# Altium PCB Route_Guide_and_Tuning.PcbDoc (part 8 of 8)
Units mil, origin at the board's own origin, x right, y up, seen from the top; angles counter-clockwise.
Board outline 3600 x 2300 mil, 14 copper layers (L1 TOP, L2_G, L3 SIG, L4_G, L4 SIG, L6_P, L7_G, L10_P, L11_P, L7 SIG, L13_P, L8 SIG, L15_G, L10 BOT), stack 89.291 mil thick; 4 components, 1934 nets, 2174 pads, 2165 vias.
Unrouted connection lines stored in the file: 123.
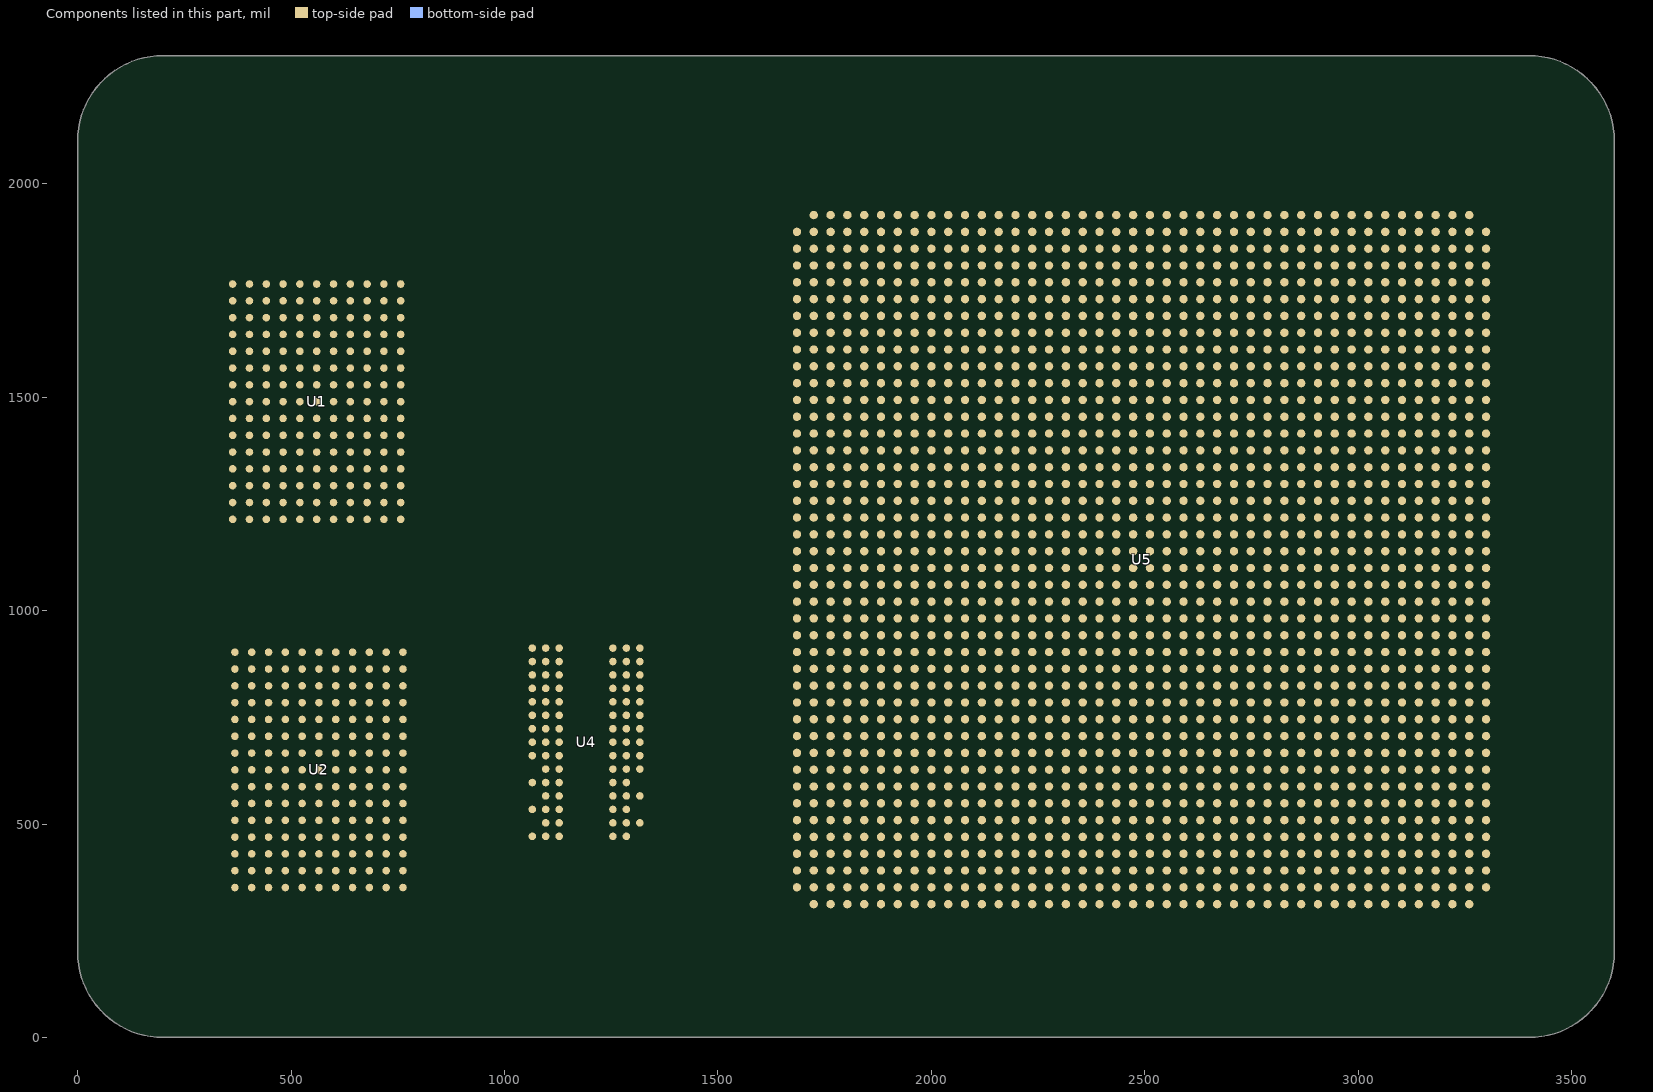
[diagram p20: the components of this part, seen from the top]

## Via types
v1: diameter 19.4, hole 10, L1 TOP to L10 BOT, 2087 vias
v2: diameter 18.6, hole 10, L1 TOP to L10 BOT, tented both sides, 78 vias

## Nets (pads, with @x,y where several pads share a name; then routed paths per layer and width w, separated by ;. In a path a pad name is that pad's centre, name@x,y a point inside that pad or via, vN(x,y) a via of type N, cw(c..) or ccw(c..) an arc to the next point about the centre after c; other vN are vias at no path point) (continued)
copper on no net: | length 3797.3
  L1 TOP w5: v1(540.43,1272.79) 560.12,1292.48 ; v2(1049.33,455.43) 1065.08,471.18 ; v2(1049.33,518.43) 1065.08,534.17 ; v2(1049.33,581.42) 1065.08,597.17 ; v2(1049.33,644.41) 1065.08,660.16 ; v2(1049.33,707.4) 1065.08,691.65 ; v2(1049.33,738.9) 1065.08,723.15 ; v2(1049.33,770.39) 1065.08,754.65 ; v2(1049.33,801.89) 1065.08,786.14 ; v2(1049.33,833.39) 1065.08,817.64 ; v2(1049.33,864.88) 1065.08,849.13 ; v2(1049.33,896.38) 1065.08,880.63 ; v2(1049.33,927.87) 1065.08,912.13 ; v2(1080.83,455.43) 1096.57,471.18 ; v2(1080.83,486.93) 1096.57,502.68 ; v2(1080.83,518.43) 1096.57,534.17 ; v2(1080.83,549.92) 1096.57,565.67 ; v2(1080.83,581.42) 1096.57,597.17 ; v2(1080.83,612.91) 1096.57,628.66 ; v2(1080.83,644.41) 1096.57,660.16 ; v2(1080.83,707.4) 1096.57,691.65 ; v2(1080.83,738.9) 1096.57,723.15 ; v2(1080.83,770.39) 1096.57,754.65 ; v2(1080.83,833.39) 1096.57,817.64 ; v2(1080.83,864.88) 1096.57,849.13 ; v2(1080.83,896.38) 1096.57,880.63 ; v2(1112.32,486.93) 1128.07,502.68 ; v2(1112.32,518.43) 1128.07,534.17 ; v2(1112.32,549.92) 1128.07,565.67 ; v2(1112.32,581.42) 1128.07,597.17 ; v2(1112.32,612.91) 1128.07,628.66 ; v2(1112.32,644.41) 1128.07,660.16 ; v2(1112.32,707.4) 1128.07,691.65 ; v2(1112.32,738.9) 1128.07,723.15 ; v2(1112.32,770.39) 1128.07,754.65 ; v2(1112.32,801.89) 1128.07,786.14 ; v2(1112.32,833.39) 1128.07,817.64 ; v2(1112.32,864.88) 1128.07,849.13 ; v2(1112.32,896.38) 1128.07,880.63 ; v2(1112.32,927.87) 1128.07,912.13 ; 1254.05,502.68 v2(1269.8,486.93) ; 1254.05,534.17 v2(1269.8,518.43) ; 1254.05,565.67 v2(1269.8,549.92) ; 1254.05,597.17 v2(1269.8,581.42) ; 1254.05,628.66 v2(1269.8,612.91) ; 1254.05,660.16 v2(1269.8,644.41) ; 1254.05,691.65 v2(1269.8,707.4) ; 1254.05,723.15 v2(1269.8,738.9) ; 1254.05,754.65 v2(1269.8,770.39) ; 1254.05,786.14 v2(1269.8,801.89) ; 1254.05,817.64 v2(1269.8,833.39) ; 1254.05,849.13 v2(1269.8,864.88) ; 1254.05,880.63 v2(1269.8,896.38) ; 1254.05,912.13 v2(1269.8,927.87) ; 1285.55,471.18 v2(1301.3,455.43) ; 1285.55,502.68 v2(1301.3,486.93) ; 1285.55,534.17 v2(1301.3,518.43) ; 1285.55,565.67 v2(1301.3,549.92) ; 1285.55,597.17 v2(1301.3,581.42) ; 1285.55,628.66 v2(1301.3,612.91) ; 1285.55,660.16 v2(1301.3,644.41) ; 1285.55,691.65 v2(1301.3,707.4) ; 1285.55,723.15 v2(1301.3,738.9) ; 1285.55,754.65 v2(1301.3,770.39) ; 1285.55,817.64 v2(1301.3,833.39) ; 1285.55,849.13 v2(1301.3,864.88) ; 1285.55,880.63 v2(1301.3,896.38) ; 1317.05,502.68 v2(1332.79,486.93) ; 1317.05,565.67 v2(1332.79,549.92) ; 1317.05,628.66 v2(1332.79,612.91) ; 1317.05,660.16 v2(1332.79,644.41) ; 1317.05,691.65 v2(1332.79,707.4) ; 1317.05,723.15 v2(1332.79,738.9) ; 1317.05,754.65 v2(1332.79,770.39) ; 1317.05,786.14 v2(1332.79,801.89) ; 1317.05,817.64 v2(1332.79,833.39) ; 1317.05,849.13 v2(1332.79,864.88) ; 1317.05,880.63 v2(1332.79,896.38) ; 1317.05,912.13 v2(1332.79,927.87) ; v1(1665.47,450.08) 1685.16,469.76 ; v1(1665.47,489.45) 1685.16,509.13 ; v1(1665.47,607.56) 1685.16,627.24 ; v1(1665.47,646.93) 1685.16,666.61 ; v1(1665.47,1237.48) 1685.16,1217.8 ; v1(1665.47,1434.33) 1685.16,1414.65 ; v1(1665.47,1670.55) 1685.16,1650.87 ; v1(1665.47,1709.92) 1685.16,1690.24 ; v1(1704.84,371.34) 1724.53,391.02 ; v1(1704.84,410.71) 1724.53,430.39 ; v1(1704.84,528.82) 1724.53,548.5 ; v1(1704.84,568.19) 1724.53,587.87 ; v1(1704.84,1158.74) 1724.53,1139.06 ; v1(1704.84,1434.33) 1724.53,1414.65 ; v1(1704.84,1709.92) 1724.53,1690.24 ; v1(1744.21,292.6) 1763.9,312.28 ; v1(1744.21,331.97) 1763.9,351.65 ; v1(1744.21,450.08) 1763.9,469.76 ; v1(1744.21,489.45) 1763.9,509.13 ; v1(1744.21,1355.59) 1763.9,1335.91 ; v1(1783.58,371.34) 1803.27,391.02 ; v1(1783.58,410.71) 1803.27,430.39 ; v1(1980.43,1237.48) 2000.12,1217.8 ; v1(1980.43,1355.59) 2000.12,1335.91 ; v1(1980.43,1394.96) 2000.12,1375.28 ; v1(2019.8,1237.48) 2039.49,1217.8 ; v1(2059.17,1158.74) 2078.86,1139.06 ; v1(2059.17,1276.85) 2078.86,1257.17 ; v1(2059.17,1316.22) 2078.86,1296.54 ; v1(2059.17,1355.59) 2078.86,1335.91 ; v1(2098.54,528.82) 2118.23,548.5 ; v1(2098.54,568.19) 2118.23,587.87 ; v1(2098.54,1001.26) 2118.23,1020.94 ; v1(2098.54,1080) 2118.23,1099.69 ; v1(2098.54,1158.74) 2118.23,1139.06 ; v1(2098.54,1316.22) 2118.23,1296.54 ; v1(2137.91,1080) 2157.6,1099.69 ; v1(2137.91,1276.85) 2157.6,1257.17 ; v1(2177.28,1040.63) 2196.97,1060.32 ; v1(2177.28,1080) 2196.97,1099.69 ; v1(2177.28,1158.74) 2196.97,1139.06 ; v1(2177.28,1198.11) 2196.97,1178.43 ; v1(2177.28,1276.85) 2196.97,1257.17 ; v1(2216.65,1198.11) 2236.34,1178.43 ; v1(2256.02,528.82) 2275.71,548.5 ; v1(2256.02,568.19) 2275.71,587.87 ; v1(2334.76,528.82) 2354.45,548.5 ; v1(2334.76,568.19) 2354.45,587.87 ; 2669.41,548.5 v1(2689.1,528.82) ; 2669.41,587.87 v1(2689.1,568.19) ; 2748.15,1217.8 v1(2767.84,1237.48) ; 2787.52,1257.17 v1(2807.21,1276.85) ; 2826.89,1375.28 v1(2846.58,1394.96) ; 2866.26,1060.32 v1(2885.95,1040.63) ; 2866.26,1611.5 v1(2885.95,1631.18) ; 2905.63,1296.54 v1(2925.32,1316.22) ; 2905.63,1572.13 v1(2925.32,1591.81) ; 2945,1375.28 v1(2964.69,1394.96) ; 2945,1650.87 v1(2964.69,1670.55) ; 3023.74,1611.5 v1(3043.43,1631.18) ; 3023.74,1847.72 v1(3043.43,1867.4) ; 3063.11,863.46 v1(3082.8,843.78) ; 3063.11,1847.72 v1(3082.8,1867.4) ; 3102.48,627.24 v1(3122.17,607.56) ; 3102.48,666.61 v1(3122.17,646.93) ; 3102.48,902.83 v1(3122.17,883.15) ; 3102.48,1768.98 v1(3122.17,1788.66) ; 3102.48,1926.46 v1(3122.17,1946.14) ; 3181.22,942.2 v1(3200.91,922.52) ; 3181.22,1532.76 v1(3200.91,1552.44) ; 3181.22,1926.46 v1(3200.91,1946.14) ; 3259.96,1454.02 v1(3279.65,1473.7) ; 3299.33,1532.76 v1(3319.02,1552.44)

## Polygon pours and split planes (outlines as drawn)
GND on L4_G (split plane): 3411.77,2279.61 3423.49,2278.46 3435.12,2276.54 3446.59,2273.86 3457.86,2270.44 3468.88,2266.3 3479.61,2261.43 3490,2255.88 3500,2249.66 3509.57,2242.8 3518.68,2235.33 3527.28,2227.28 3535.33,2218.68 3542.8,2209.57 3549.66,2200 3555.88,2190 3561.43,2179.61 3566.3,2168.88 3570.44,2157.86 3573.86,2146.59 3576.54,2135.12 3578.46,2123.49 3579.61,2111.77 3579.97,2100.71 3579.9,2100 3579.9,200 3579.97,199.29 3579.61,188.23 3578.46,176.5 3576.54,164.88 3573.86,153.41 3570.44,142.14 3566.29,131.12 3561.43,120.39 3555.88,110 3549.66,100 3542.8,90.42 3535.33,81.32 3527.28,72.72 3518.68,64.67 3509.57,57.2 3500,50.34 3490,44.12 3479.61,38.57 3468.88,33.7 3457.86,29.56 3446.59,26.14 3435.11,23.46 3423.49,21.54 3411.77,20.39 3400.71,20.03 3400,20.1 200,20.1 199.29,20.03 188.23,20.39 176.51,21.54 164.88,23.46 153.41,26.14 142.14,29.56 131.12,33.71 120.39,38.57 110,44.12 100,50.34 90.43,57.2 81.32,64.67 72.72,72.72 64.67,81.32 57.2,90.42 50.34,100 44.12,110 38.57,120.39 33.71,131.12 29.56,142.14 26.14,153.41 23.46,164.88 21.54,176.5 20.39,188.23 20.03,199.29 20.1,200 20.1,2100 20.03,2100.71 20.39,2111.77 21.54,2123.49 23.46,2135.11 26.14,2146.59 29.55,2157.86 33.7,2168.88 38.57,2179.61 44.12,2190 50.34,2200 57.2,2209.57 64.67,2218.68 72.72,2227.28 81.32,2235.33 90.42,2242.8 100,2249.66 110,2255.88 120.39,2261.43 131.12,2266.29 142.14,2270.44 153.41,2273.86 164.88,2276.54 176.5,2278.46 188.23,2279.61 199.29,2279.97 200,2279.9 3400,2279.9 3400.71,2279.97
GND on L15_G (split plane): 3411.77,2279.61 3423.49,2278.46 3435.12,2276.54 3446.59,2273.86 3457.86,2270.44 3468.88,2266.3 3479.61,2261.43 3490,2255.88 3500,2249.66 3509.57,2242.8 3518.68,2235.33 3527.28,2227.28 3535.33,2218.68 3542.8,2209.57 3549.66,2200 3555.88,2190 3561.43,2179.61 3566.3,2168.88 3570.44,2157.86 3573.86,2146.59 3576.54,2135.12 3578.46,2123.49 3579.61,2111.77 3579.97,2100.71 3579.9,2100 3579.9,200 3579.97,199.29 3579.61,188.23 3578.46,176.5 3576.54,164.88 3573.86,153.41 3570.44,142.14 3566.29,131.12 3561.43,120.39 3555.88,110 3549.66,100 3542.8,90.42 3535.33,81.32 3527.28,72.72 3518.68,64.67 3509.57,57.2 3500,50.34 3490,44.12 3479.61,38.57 3468.88,33.7 3457.86,29.56 3446.59,26.14 3435.11,23.46 3423.49,21.54 3411.77,20.39 3400.71,20.03 3400,20.1 200,20.1 199.29,20.03 188.23,20.39 176.51,21.54 164.88,23.46 153.41,26.14 142.14,29.56 131.12,33.71 120.39,38.57 110,44.12 100,50.34 90.43,57.2 81.32,64.67 72.72,72.72 64.67,81.32 57.2,90.42 50.34,100 44.12,110 38.57,120.39 33.71,131.12 29.56,142.14 26.14,153.41 23.46,164.88 21.54,176.5 20.39,188.23 20.03,199.29 20.1,200 20.1,2100 20.03,2100.71 20.39,2111.77 21.54,2123.49 23.46,2135.11 26.14,2146.59 29.55,2157.86 33.7,2168.88 38.57,2179.61 44.12,2190 50.34,2200 57.2,2209.57 64.67,2218.68 72.72,2227.28 81.32,2235.33 90.42,2242.8 100,2249.66 110,2255.88 120.39,2261.43 131.12,2266.29 142.14,2270.44 153.41,2273.86 164.88,2276.54 176.5,2278.46 188.23,2279.61 199.29,2279.97 200,2279.9 3400,2279.9 3400.71,2279.97
GND on L2_G (split plane): 3411.77,2279.61 3423.49,2278.46 3435.12,2276.54 3446.59,2273.86 3457.86,2270.44 3468.88,2266.3 3479.61,2261.43 3490,2255.88 3500,2249.66 3509.57,2242.8 3518.68,2235.33 3527.28,2227.28 3535.33,2218.68 3542.8,2209.57 3549.66,2200 3555.88,2190 3561.43,2179.61 3566.3,2168.88 3570.44,2157.86 3573.86,2146.59 3576.54,2135.12 3578.46,2123.49 3579.61,2111.77 3579.97,2100.71 3579.9,2100 3579.9,200 3579.97,199.29 3579.61,188.23 3578.46,176.5 3576.54,164.88 3573.86,153.41 3570.44,142.14 3566.29,131.12 3561.43,120.39 3555.88,110 3549.66,100 3542.8,90.42 3535.33,81.32 3527.28,72.72 3518.68,64.67 3509.57,57.2 3500,50.34 3490,44.12 3479.61,38.57 3468.88,33.7 3457.86,29.56 3446.59,26.14 3435.11,23.46 3423.49,21.54 3411.77,20.39 3400.71,20.03 3400,20.1 200,20.1 199.29,20.03 188.23,20.39 176.51,21.54 164.88,23.46 153.41,26.14 142.14,29.56 131.12,33.71 120.39,38.57 110,44.12 100,50.34 90.43,57.2 81.32,64.67 72.72,72.72 64.67,81.32 57.2,90.42 50.34,100 44.12,110 38.57,120.39 33.71,131.12 29.56,142.14 26.14,153.41 23.46,164.88 21.54,176.5 20.39,188.23 20.03,199.29 20.1,200 20.1,2100 20.03,2100.71 20.39,2111.77 21.54,2123.49 23.46,2135.11 26.14,2146.59 29.55,2157.86 33.7,2168.88 38.57,2179.61 44.12,2190 50.34,2200 57.2,2209.57 64.67,2218.68 72.72,2227.28 81.32,2235.33 90.42,2242.8 100,2249.66 110,2255.88 120.39,2261.43 131.12,2266.29 142.14,2270.44 153.41,2273.86 164.88,2276.54 176.5,2278.46 188.23,2279.61 199.29,2279.97 200,2279.9 3400,2279.9 3400.71,2279.97
1V0 on L6_P (split plane): 3411.77,2279.61 3423.49,2278.46 3435.12,2276.54 3446.59,2273.86 3457.86,2270.44 3468.88,2266.3 3479.61,2261.43 3490,2255.88 3500,2249.66 3509.57,2242.8 3518.68,2235.33 3527.28,2227.28 3535.33,2218.68 3542.8,2209.57 3549.66,2200 3555.88,2190 3561.43,2179.61 3566.3,2168.88 3570.44,2157.86 3573.86,2146.59 3576.54,2135.12 3578.46,2123.49 3579.61,2111.77 3579.97,2100.71 3579.9,2100 3579.9,200 3579.97,199.29 3579.61,188.23 3578.46,176.5 3576.54,164.88 3573.86,153.41 3570.44,142.14 3566.29,131.12 3561.43,120.39 3555.88,110 3549.66,100 3542.8,90.42 3535.33,81.32 3527.28,72.72 3518.68,64.67 3509.57,57.2 3500,50.34 3490,44.12 3479.61,38.57 3468.88,33.7 3457.86,29.56 3446.59,26.14 3435.11,23.46 3423.49,21.54 3411.77,20.39 3400.71,20.03 3400,20.1 200,20.1 199.29,20.03 188.23,20.39 176.51,21.54 164.88,23.46 153.41,26.14 142.14,29.56 131.12,33.71 120.39,38.57 110,44.12 100,50.34 90.43,57.2 81.32,64.67 72.72,72.72 64.67,81.32 57.2,90.42 50.34,100 44.12,110 38.57,120.39 33.71,131.12 29.56,142.14 26.14,153.41 23.46,164.88 21.54,176.5 20.39,188.23 20.03,199.29 20.1,200 20.1,2100 20.03,2100.71 20.39,2111.77 21.54,2123.49 23.46,2135.11 26.14,2146.59 29.55,2157.86 33.7,2168.88 38.57,2179.61 44.12,2190 50.34,2200 57.2,2209.57 64.67,2218.68 72.72,2227.28 81.32,2235.33 90.42,2242.8 100,2249.66 110,2255.88 120.39,2261.43 131.12,2266.29 142.14,2270.44 153.41,2273.86 164.88,2276.54 176.5,2278.46 188.23,2279.61 199.29,2279.97 200,2279.9 3400,2279.9 3400.71,2279.97
GND on L7_G (split plane): 3411.77,2279.61 3423.49,2278.46 3435.12,2276.54 3446.59,2273.86 3457.86,2270.44 3468.88,2266.3 3479.61,2261.43 3490,2255.88 3500,2249.66 3509.57,2242.8 3518.68,2235.33 3527.28,2227.28 3535.33,2218.68 3542.8,2209.57 3549.66,2200 3555.88,2190 3561.43,2179.61 3566.3,2168.88 3570.44,2157.86 3573.86,2146.59 3576.54,2135.12 3578.46,2123.49 3579.61,2111.77 3579.97,2100.71 3579.9,2100 3579.9,200 3579.97,199.29 3579.61,188.23 3578.46,176.5 3576.54,164.88 3573.86,153.41 3570.44,142.14 3566.29,131.12 3561.43,120.39 3555.88,110 3549.66,100 3542.8,90.42 3535.33,81.32 3527.28,72.72 3518.68,64.67 3509.57,57.2 3500,50.34 3490,44.12 3479.61,38.57 3468.88,33.7 3457.86,29.56 3446.59,26.14 3435.11,23.46 3423.49,21.54 3411.77,20.39 3400.71,20.03 3400,20.1 200,20.1 199.29,20.03 188.23,20.39 176.51,21.54 164.88,23.46 153.41,26.14 142.14,29.56 131.12,33.71 120.39,38.57 110,44.12 100,50.34 90.43,57.2 81.32,64.67 72.72,72.72 64.67,81.32 57.2,90.42 50.34,100 44.12,110 38.57,120.39 33.71,131.12 29.56,142.14 26.14,153.41 23.46,164.88 21.54,176.5 20.39,188.23 20.03,199.29 20.1,200 20.1,2100 20.03,2100.71 20.39,2111.77 21.54,2123.49 23.46,2135.11 26.14,2146.59 29.55,2157.86 33.7,2168.88 38.57,2179.61 44.12,2190 50.34,2200 57.2,2209.57 64.67,2218.68 72.72,2227.28 81.32,2235.33 90.42,2242.8 100,2249.66 110,2255.88 120.39,2261.43 131.12,2266.29 142.14,2270.44 153.41,2273.86 164.88,2276.54 176.5,2278.46 188.23,2279.61 199.29,2279.97 200,2279.9 3400,2279.9 3400.71,2279.97
1V5 on L10_P (split plane): 3411.77,2279.61 3423.49,2278.46 3435.12,2276.54 3446.59,2273.86 3457.86,2270.44 3468.88,2266.3 3479.61,2261.43 3490,2255.88 3500,2249.66 3509.57,2242.8 3518.68,2235.33 3527.28,2227.28 3535.33,2218.68 3542.8,2209.57 3549.66,2200 3555.88,2190 3561.43,2179.61 3566.3,2168.88 3570.44,2157.86 3573.86,2146.59 3576.54,2135.12 3578.46,2123.49 3579.61,2111.77 3579.97,2100.71 3579.9,2100 3579.9,200 3579.97,199.29 3579.61,188.23 3578.46,176.5 3576.54,164.88 3573.86,153.41 3570.44,142.14 3566.29,131.12 3561.43,120.39 3555.88,110 3549.66,100 3542.8,90.42 3535.33,81.32 3527.28,72.72 3518.68,64.67 3509.57,57.2 3500,50.34 3490,44.12 3479.61,38.57 3468.88,33.7 3457.86,29.56 3446.59,26.14 3435.11,23.46 3423.49,21.54 3411.77,20.39 3400.71,20.03 3400,20.1 200,20.1 199.29,20.03 188.23,20.39 176.51,21.54 164.88,23.46 153.41,26.14 142.14,29.56 131.12,33.71 120.39,38.57 110,44.12 100,50.34 90.43,57.2 81.32,64.67 72.72,72.72 64.67,81.32 57.2,90.42 50.34,100 44.12,110 38.57,120.39 33.71,131.12 29.56,142.14 26.14,153.41 23.46,164.88 21.54,176.5 20.39,188.23 20.03,199.29 20.1,200 20.1,2100 20.03,2100.71 20.39,2111.77 21.54,2123.49 23.46,2135.11 26.14,2146.59 29.55,2157.86 33.7,2168.88 38.57,2179.61 44.12,2190 50.34,2200 57.2,2209.57 64.67,2218.68 72.72,2227.28 81.32,2235.33 90.42,2242.8 100,2249.66 110,2255.88 120.39,2261.43 131.12,2266.29 142.14,2270.44 153.41,2273.86 164.88,2276.54 176.5,2278.46 188.23,2279.61 199.29,2279.97 200,2279.9 3400,2279.9 3400.71,2279.97
1V8 on L11_P (split plane): 3411.77,2279.61 3423.49,2278.46 3435.12,2276.54 3446.59,2273.86 3457.86,2270.44 3468.88,2266.3 3479.61,2261.43 3490,2255.88 3500,2249.66 3509.57,2242.8 3518.68,2235.33 3527.28,2227.28 3535.33,2218.68 3542.8,2209.57 3549.66,2200 3555.88,2190 3561.43,2179.61 3566.3,2168.88 3570.44,2157.86 3573.86,2146.59 3576.54,2135.12 3578.46,2123.49 3579.61,2111.77 3579.97,2100.71 3579.9,2100 3579.9,200 3579.97,199.29 3579.61,188.23 3578.46,176.5 3576.54,164.88 3573.86,153.41 3570.44,142.14 3566.29,131.12 3561.43,120.39 3555.88,110 3549.66,100 3542.8,90.42 3535.33,81.32 3527.28,72.72 3518.68,64.67 3509.57,57.2 3500,50.34 3490,44.12 3479.61,38.57 3468.88,33.7 3457.86,29.56 3446.59,26.14 3435.11,23.46 3423.49,21.54 3411.77,20.39 3400.71,20.03 3400,20.1 200,20.1 199.29,20.03 188.23,20.39 176.51,21.54 164.88,23.46 153.41,26.14 142.14,29.56 131.12,33.71 120.39,38.57 110,44.12 100,50.34 90.43,57.2 81.32,64.67 72.72,72.72 64.67,81.32 57.2,90.42 50.34,100 44.12,110 38.57,120.39 33.71,131.12 29.56,142.14 26.14,153.41 23.46,164.88 21.54,176.5 20.39,188.23 20.03,199.29 20.1,200 20.1,2100 20.03,2100.71 20.39,2111.77 21.54,2123.49 23.46,2135.11 26.14,2146.59 29.55,2157.86 33.7,2168.88 38.57,2179.61 44.12,2190 50.34,2200 57.2,2209.57 64.67,2218.68 72.72,2227.28 81.32,2235.33 90.42,2242.8 100,2249.66 110,2255.88 120.39,2261.43 131.12,2266.29 142.14,2270.44 153.41,2273.86 164.88,2276.54 176.5,2278.46 188.23,2279.61 199.29,2279.97 200,2279.9 3400,2279.9 3400.71,2279.97
2V5 on L13_P (split plane): 3411.77,2279.61 3423.49,2278.46 3435.12,2276.54 3446.59,2273.86 3457.86,2270.44 3468.88,2266.3 3479.61,2261.43 3490,2255.88 3500,2249.66 3509.57,2242.8 3518.68,2235.33 3527.28,2227.28 3535.33,2218.68 3542.8,2209.57 3549.66,2200 3555.88,2190 3561.43,2179.61 3566.3,2168.88 3570.44,2157.86 3573.86,2146.59 3576.54,2135.12 3578.46,2123.49 3579.61,2111.77 3579.97,2100.71 3579.9,2100 3579.9,200 3579.97,199.29 3579.61,188.23 3578.46,176.5 3576.54,164.88 3573.86,153.41 3570.44,142.14 3566.29,131.12 3561.43,120.39 3555.88,110 3549.66,100 3542.8,90.42 3535.33,81.32 3527.28,72.72 3518.68,64.67 3509.57,57.2 3500,50.34 3490,44.12 3479.61,38.57 3468.88,33.7 3457.86,29.56 3446.59,26.14 3435.11,23.46 3423.49,21.54 3411.77,20.39 3400.71,20.03 3400,20.1 200,20.1 199.29,20.03 188.23,20.39 176.51,21.54 164.88,23.46 153.41,26.14 142.14,29.56 131.12,33.71 120.39,38.57 110,44.12 100,50.34 90.43,57.2 81.32,64.67 72.72,72.72 64.67,81.32 57.2,90.42 50.34,100 44.12,110 38.57,120.39 33.71,131.12 29.56,142.14 26.14,153.41 23.46,164.88 21.54,176.5 20.39,188.23 20.03,199.29 20.1,200 20.1,2100 20.03,2100.71 20.39,2111.77 21.54,2123.49 23.46,2135.11 26.14,2146.59 29.55,2157.86 33.7,2168.88 38.57,2179.61 44.12,2190 50.34,2200 57.2,2209.57 64.67,2218.68 72.72,2227.28 81.32,2235.33 90.42,2242.8 100,2249.66 110,2255.88 120.39,2261.43 131.12,2266.29 142.14,2270.44 153.41,2273.86 164.88,2276.54 176.5,2278.46 188.23,2279.61 199.29,2279.97 200,2279.9 3400,2279.9 3400.71,2279.97

## Silkscreen, mask and mechanical layers (free items; w line width, h text height)
Top Overlay:
  text "Route Guide and Tuning" at 1110,2120.44 h120
2_DIMENSION:
  the board outline again, w25
Route Guilde:
  lines w175: 900,400 1000,300 1400,300 1538.83,438.83 1538.83,898.4